# Altium PCB Head_unit.PcbDoc
Units mil, origin at the board's own origin, x right, y up, seen from the top; angles counter-clockwise.
Board outline 2420 x 1500 mil, 2 copper layers (Top Layer, Bottom Layer); 13 components, 27 nets, 42 pads, 2 vias.
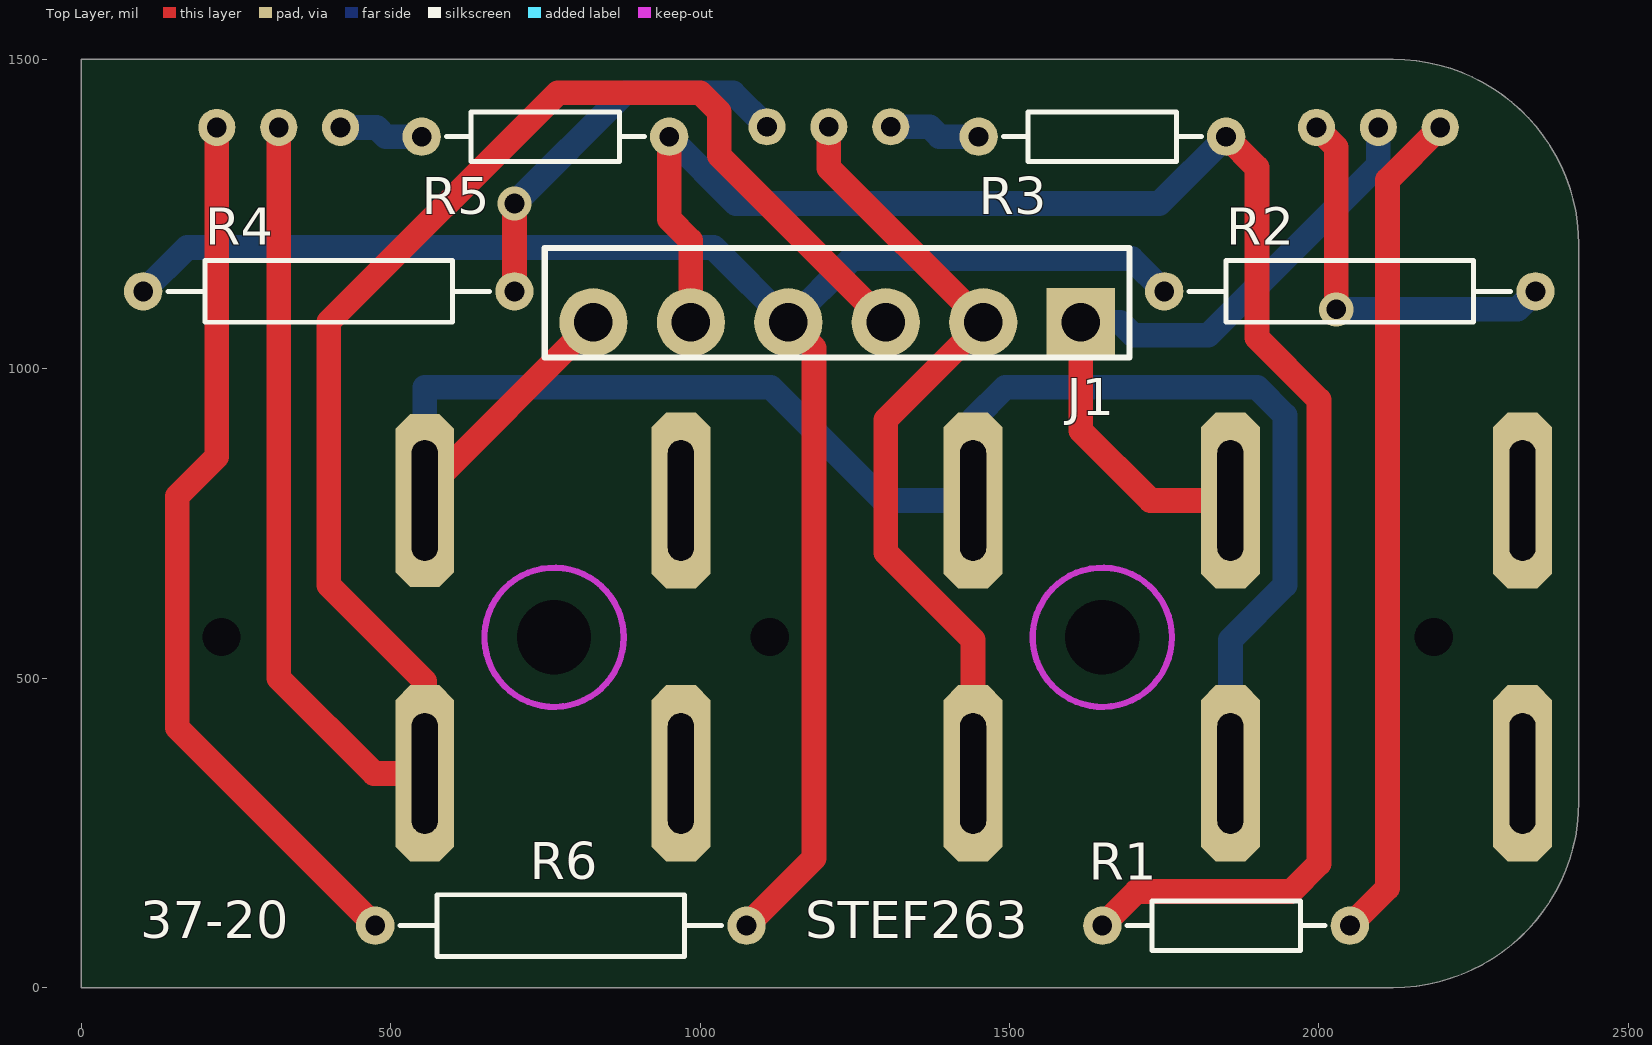
[diagram p0: Top Layer view]
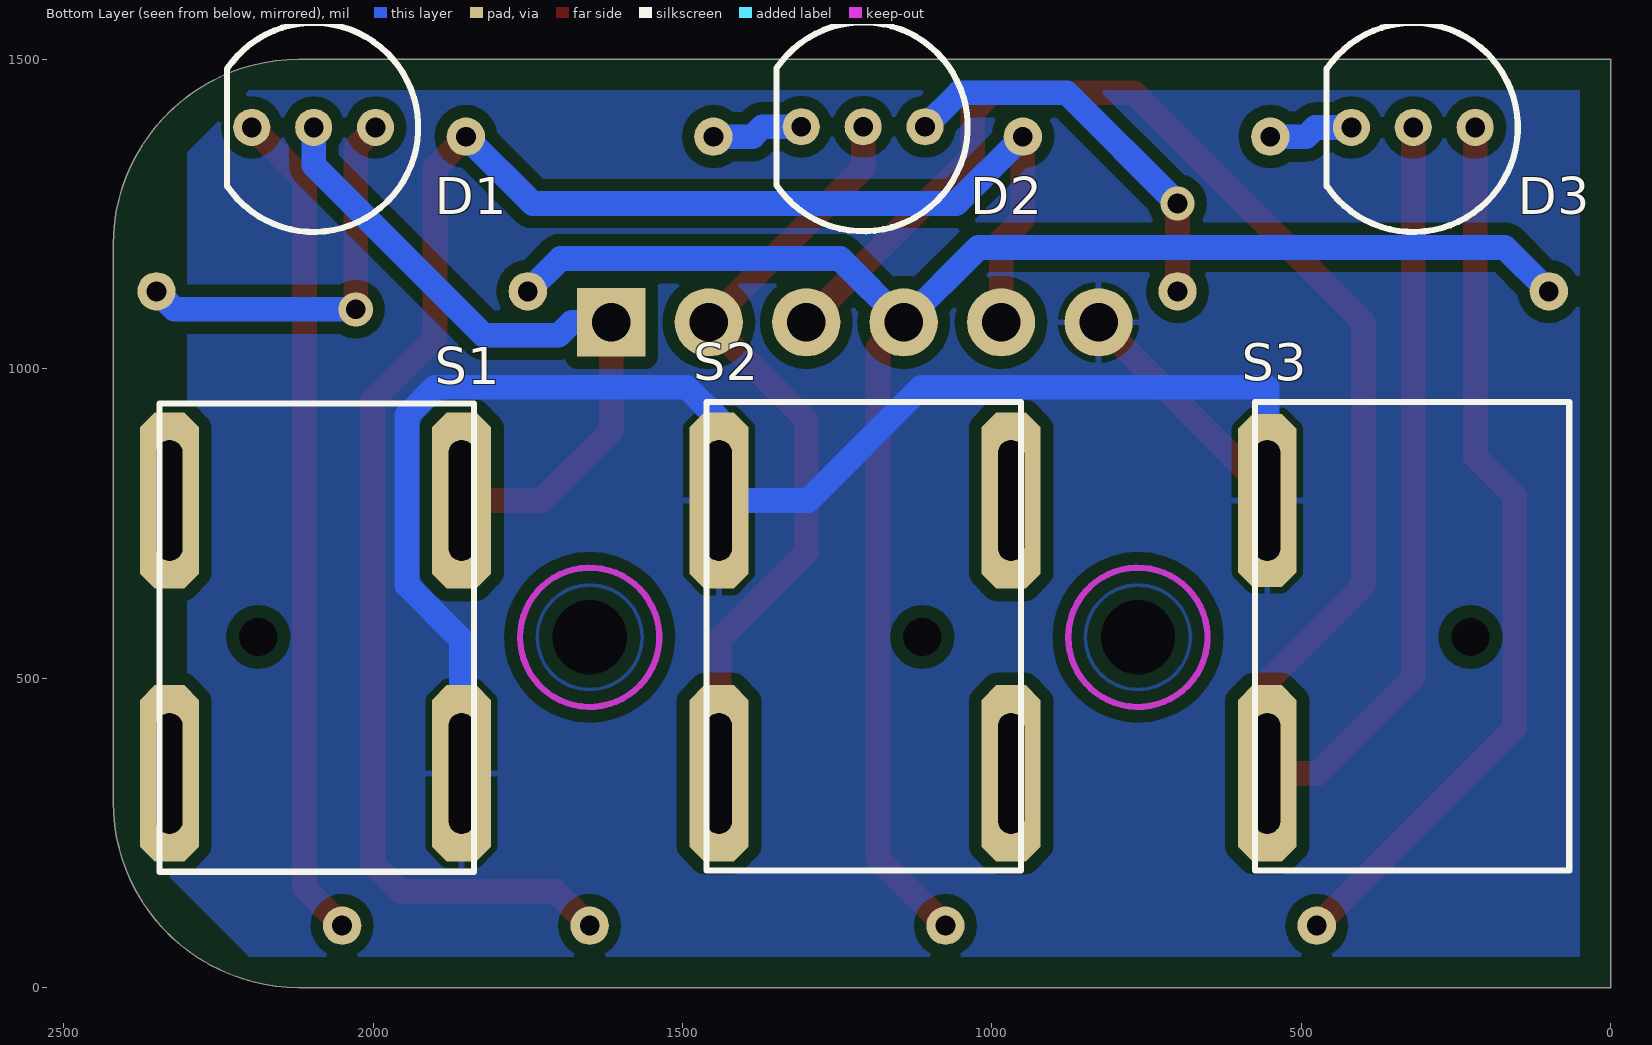
[diagram p1: Bottom Layer view, seen from below]

## Layer stack, top to bottom
Top Solder: solder mask 0.4, Solder Resist, Dk 3.5
Top Layer: signal copper 1.4
Dielectric 1: dielectric 12.6, FR-4, Dk 4.8
Bottom Layer: signal copper 1.4
Bottom Solder: solder mask 0.4, Solder Resist, Dk 3.5

## Board outline
0,0 2120,0 ccw(c2120,300) 2420,300 2420,1200 ccw(c2120,1200) 2120,1500 0,1500

## Design rules (kind name [scope] priority, off if disabled: settings)
Clearance [All] p1: gap=20 ignorepadtopadclearanceinfootprint=FALSE
HoleSize [All] p1: absolutevalues=TRUE maxlimit=250 minlimit=1 maxpercent=80.000 minpercent=20.000
PolygonConnect [All] p1: connectstyle=Relief reliefconductorwidth=10 reliefentries=4 polygonreliefangle="90 Angle" airgapwidth=10
RoutingVias [All] p1: holewidth=32 width=55 viastyle="Through Hole" minholewidth=32 minwidth=55 maxholewidth=32 maxwidth=55
SolderMaskExpansion [All] p1: expansion=4
Width [All] p1: maxlimit=100 minlimit=20 preferedwidth=40
Width Width_led_b [InNet('GND')] p2: maxlimit=100 minlimit=20 preferedwidth=40
Width Width_led_r [InNet('RD_LED')] p3: maxlimit=100 minlimit=20 preferedwidth=40
Width Width_gnd [InNet('GND')] p4: maxlimit=100 minlimit=10 preferedwidth=60
29 further rules are at their usual default settings.

## Components (designator, comment, footprint, x,y, rotation, side; value= is the part's Value field where it differs from the comment)
D1 "NOS" DIODE_2COLOR_RAD 2246,1340 r180 bottom
D2 "HEATER" DIODE_2COLOR_RAD 1358,1341 r180 bottom
D3 "PURGE" DIODE_2COLOR_RAD 469,1340 r180 bottom
J1 "FP_CONNECTOR" MOLEX_51036_6POS 1614.96,1075 r180 top
R1 "Res1" AXIAL-0.4 1850,100 r0 top value=4.7k
R2 "Res1" AXIAL-0.6 2050,1125 r0 top value=470/1W
R3 "Res1" AXIAL-0.4 1650,1375 r180 top value=4.7k
R4 "Res1" AXIAL-0.6 400,1125 r0 top value=470/1W
R5 "Res1" AXIAL-0.4 750,1375 r180 top value=4.7k
R6 "Res1" AXIAL-0.6 775,100 r180 top value=470/1W
S1 "NOS_SW" PA4_DPST 1857,787 r0 bottom
S2 "HEATER_SW" PA4_DPST 1441,346 r180 bottom
S3 "PURGE_SW" PA4_SPST 555,346 r180 bottom

## Footprints (in the part's own frame and the unit in brackets; to place one, negate y for a bottom-side part, rotate by r counter-clockwise, add the part's x,y. Pads: shape width x height; smd on the part's side, far side on the other; paste and mask are expansions set on the pad)
AXIAL-0.4 [mil] "Axial Device, Thru-Hole; 2 Leads; 0.4 in Pin Spacing"
  round 62 hole 32: 1(-200,0) 2(200,0)
  silkscreen extent -160,-40 160,40
AXIAL-0.6 [mil] "Axial Device, Thru-Hole; 2 Leads; 0.6 in Pin Spacing"
  round 62 hole 32: 1(-300,0) 2(300,0)
  silkscreen extent -260,-50 260,50
DIODE_2COLOR_RAD [mil]
  round 60 hole 32: 1(50,50) 2(150,50) 3(250,50)
  silkscreen extent 10,-119 319,219
MOLEX_51036_6POS [mm]
  rect 2.8x2.8 hole 1.575: 1(0,0)
  round 2.8 hole 1.575: 2(4,0) 3(8,0) 4(12,0) 5(16,0) 6(20,0)
  silkscreen extent -2,-3.05 22,1.45
PA4_DPST [mil] "DPST push switch"
  oct 95x285 hole 42 slot 195 at 90 deg: 1(0,0) 2(0,441) 3(472,0) 4(472,441)
  round 0 hole 62: ""(328.5,220.5)
  silkscreen extent -20,-157 488,600
PA4_SPST [mil] "SPST push switch"
  oct 95x285 hole 42 slot 195 at 90 deg: 1(0,0)
  oct 95x280 hole 42 slot 195 at 90 deg: 2(0,441)
  round 0 hole 62: ""(328.5,220.5)
  silkscreen extent -20,-157 488,600

## Part data
D1 D2 D3: library part LED_DUAL_COLOR_CC, "Red/Blue LED", PartNo=XLMDKCBD59M
J1: library part "Header 6", "Header, 6-Pin", LatestRevisionDate=17-Jul-2002, LatestRevisionNote="Re-released for DXP Platform.", Publisher="Altium Limited"
R1 R2 R3 R4 R5 R6: "Resistor", LatestRevisionDate=17-Jul-2002, LatestRevisionNote="Re-released for DXP Platform.", PackageDescription="Axial Device, Thru-Hole; 2 Leads; 0.3 in Pin Spacing", PackageReference=AXIAL-0.3, Published=8-Jun-2000, Publisher="Altium Limited"
S1 S2 S3: library part SW-SPST, "Single-Pole, Single-Throw Switch", LatestRevisionDate=17-Jul-2002, LatestRevisionNote="Re-released for DXP Platform.", PackageDescription="Switch; 2 Leads", PackageReference=SPST-2, Published=24-Mar-1999, Publisher="Altium Limited"

## Free pads (board coordinates)
  round 0 hole 120 unplated: ""(764,566) ""(1650,566)

## Via types
v1: diameter 55, hole 32, Top Layer to Bottom Layer, 2 vias

## Nets (pads, with @x,y where several pads share a name; then routed paths per layer and width w, separated by ;. In a path a pad name is that pad's centre, name@x,y a point inside that pad or via, vN(x,y) a via of type N, cw(c..) or ccw(c..) an arc to the next point about the centre after c; other vN are vias at no path point)
ACC: 
BL_LED: J1.4 R2.1 R4.1 R6.1 | length 2831.5
  Top Layer w40: R6.1 1184,209 1184,1033.52 J1.4
  Bottom Layer w40: R4.1 171,1196 1021.52,1196 J1.4 1245.52,1178 1697,1178 R2.1
GND: J1.6 S1.2 S2.2 S3.2 | length 2836.3
  Top Layer w40: S3.2 555,802.44 J1.6
  Bottom Layer w40: S3.2 555,970 1114,970 1297,787 S2.2 1441,918 1493,970 1900,970 1945,925 1945,650 1857,562 S1.2
HEAT_SW: D2.2 J1.2 S2.1 | length 1272
  Top Layer w40: D2.2 1208,1324.48 J1.2 1300,917.52 1300,703 1441,562 S2.1
HEATER_PWR: 
ILLUMINATION: 
NetC3_2: 
NetC4_2: 
NetD1_1: D1.1 R1.2 | length 1350.5
  Top Layer w40: R1.2 2111,161 2111,1305 D1.1
NetD1_3: D1.3 R2.2 | length 641.3
  Top Layer w40: D1.3 2028,1358 v1(2028,1096)
  Bottom Layer w40: v1(2028,1096) 2321,1096 R2.2
NetD2_1: D2.1 R3.2 | length 148.6
  Bottom Layer w40: D2.1 1371,1391 1387,1375 R3.2
NetD2_3: D2.3 R4.2 | length 646.9
  Top Layer w40: R4.2 v1(700,1267)
  Bottom Layer w40: v1(700,1267) 879,1446 1053,1446 D2.3
NetD3_1: D3.1 R5.2 | length 137.2
  Bottom Layer w40: D3.1 477,1390 492,1375 R5.2
NetD3_3: D3.3 R6.2 | length 1449.1
  Top Layer w40: D3.3 219,858 155,794 155,420 R6.2
NetD7_1: 
NetQ1_2: 
NetR8_1: 
NetR10_2: 
NetU1_6: 
NIGHT_LIGHT: 
NOS_PWR: 
NOS_SW: D1.2 J1.1 S1.1 | length 1128.5
  Top Layer w40: J1.1 1614.96,900 1727.96,787 S1.1
  Bottom Layer w40: J1.1 1679,1075 1700,1054 1821,1054 2096,1329 D1.2
PURGE_PWR: 
PURGE_SW: D3.2 J1.3 S3.1 | length 3232.4
  Top Layer w40: D3.2 319,500 473,346 S3.1 555,495 400,650 400,1075.78 770.22,1446 1000,1446 1031,1415 1031,1344 J1.3
RD_LED: J1.5 R1.1 R3.1 R5.1 | length 2932.5
  Top Layer w40: R5.1 950,1242.04 985.04,1207 J1.5 ; R1.1 1705,155 1955,155 2000,200 2000,950 1900,1050 1900,1325 R3.1
  Bottom Layer w40: R5.1 1058,1267 1742,1267 R3.1
VCC_HEATER: 
VCC_NOS: 
pads on no net: S1. S1.3 S1.4 S2. S2.3 S2.4 S3.

## Polygon pours and split planes (outlines as drawn)
GND on Bottom Layer "Bottom Layer-GND" (solid, pour order 2): 50,50 2200,50 2350,200 2300,250 2300,1350 2200,1450 50,1450

## Keep-outs
Keep-Out Layer:
  circle w10: c1650,566 r112.5
  circle w10: c764,566 r112.5

## Silkscreen, mask and mechanical layers (free items; w line width, h text height)
Top Overlay:
  text "37-20" at 95,80 h60
  text "STEF263" at 1170,80 h60
Mechanical 1:
  circle w10: c1650,566 r61
  circle w10: c764,566 r61
  circle w0.01: c1207.09,1390.16 r20
  circle w0.01: c1307.37,1390.16 r20
  circle w0.01: c1108.1,1390.16 r20
  circle w0.01: c417.07,1390.16 r20
  circle w0.01: c217.8,1390.16 r20
  circle w0.01: c318.09,1390.16 r20
  circle w0.01: c2195.07,1390.16 r20
  circle w0.01: c1995.8,1390.16 r20
  circle w0.01: c2096.09,1390.16 r20
  lines w0.01: 0,0 0,1500 2120,1500 cw(c2120,1200) 2420,1200 2420,300 cw(c2120,300) 2120,0 0,0 ; 64.05,248.23 64.05,443.23 106.05,443.23 106.05,248.23 64.05,248.23 ; 64.05,689.18 106.05,689.18 106.05,884.18 64.05,884.18 64.05,689.18 ; 536.49,248.23 536.49,443.23 578.49,443.23 578.49,248.23 536.49,248.23 ; 536.49,689.18 536.49,884.18 578.49,884.18 578.49,689.18 536.49,689.18 ; 950.05,248.23 950.05,443.23 992.05,443.23 992.05,248.23 950.05,248.23 ; 950.05,689.18 992.05,689.18 992.05,884.18 950.05,884.18 950.05,689.18 ; 1422.49,248.23 1422.49,443.23 1464.49,443.23 1464.49,248.23 1422.49,248.23 ; 1422.49,689.18 1464.49,689.18 1464.49,884.18 1422.49,884.18 1422.49,689.18 ; 1834.05,248.23 1834.05,443.23 1876.05,443.23 1876.05,248.23 1834.05,248.23 ; 1834.05,689.18 1876.05,689.18 1876.05,884.18 1834.05,884.18 1834.05,689.18 ; 2306.49,248.23 2306.49,443.23 2348.49,443.23 2348.49,248.23 2306.49,248.23 ; 2306.49,689.18 2348.49,689.18 2348.49,884.18 2306.49,884.18 2306.49,689.18
ToolPath:
  lines w10: -5,0 ccw(c0,0) 0,-5 ; -5,0 ccw(c0,0) 0,-5 ; -5,0 -5,1500 ; -5,1500 cw(c0,1500) 0,1505 ; -5,1500 cw(c0,1500) 0,1505 ; 0,-5 2120,-5 ccw(c2120,300) 2425,300 2425,1200 ccw(c2120,1200) 2120,1505 0,1505